# EAGLE board NARTF (EAGLE 7.7.0)
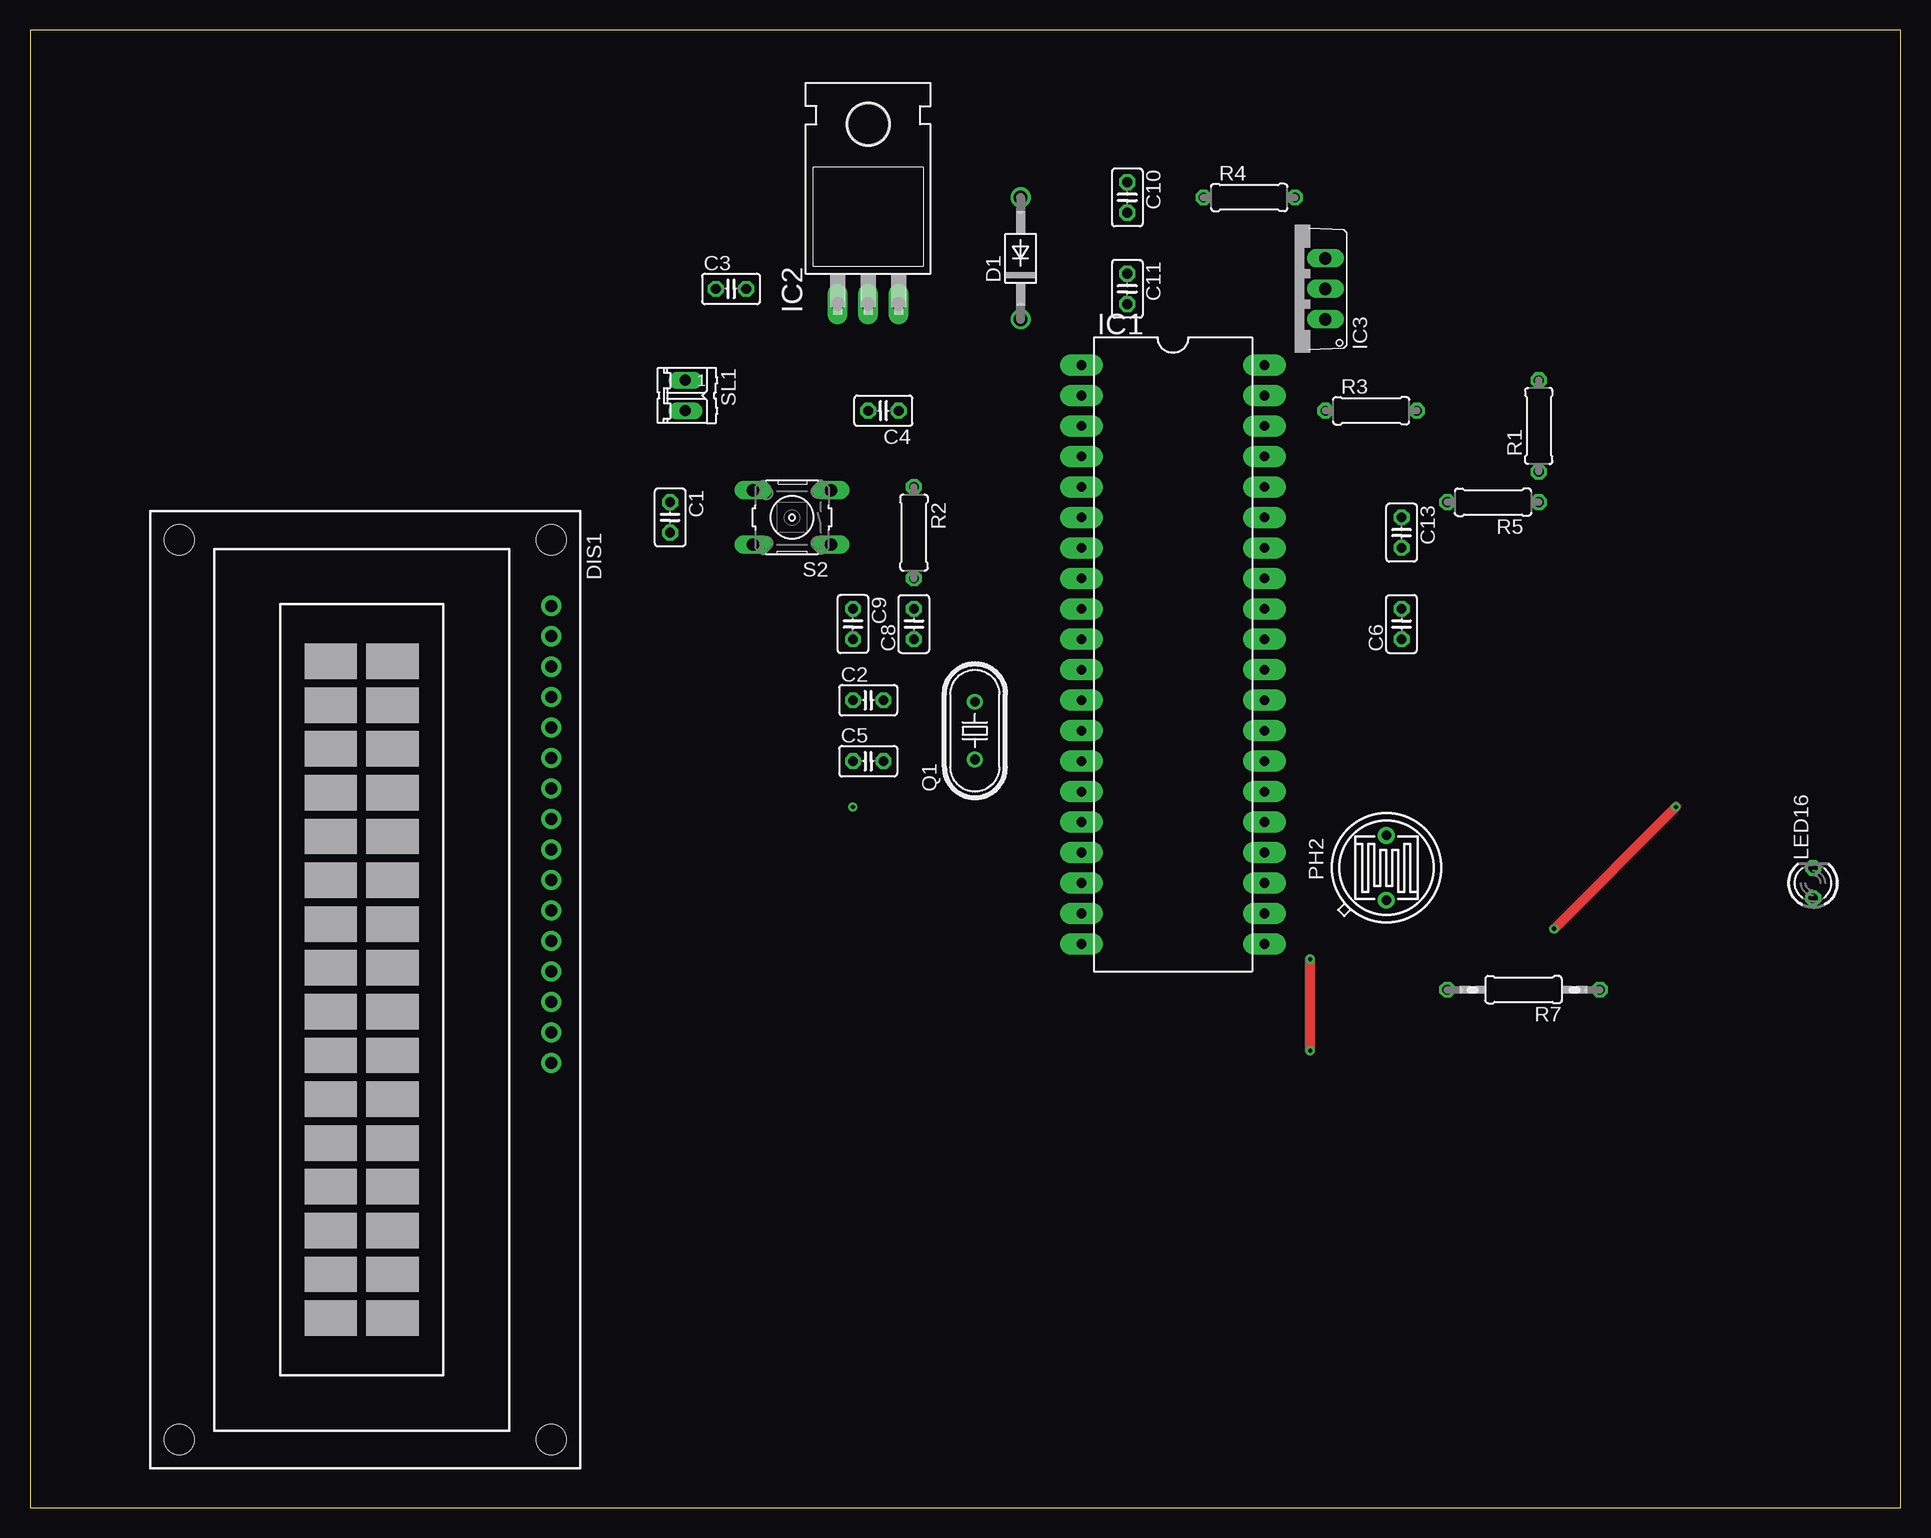
[diagram p0: board, top side]
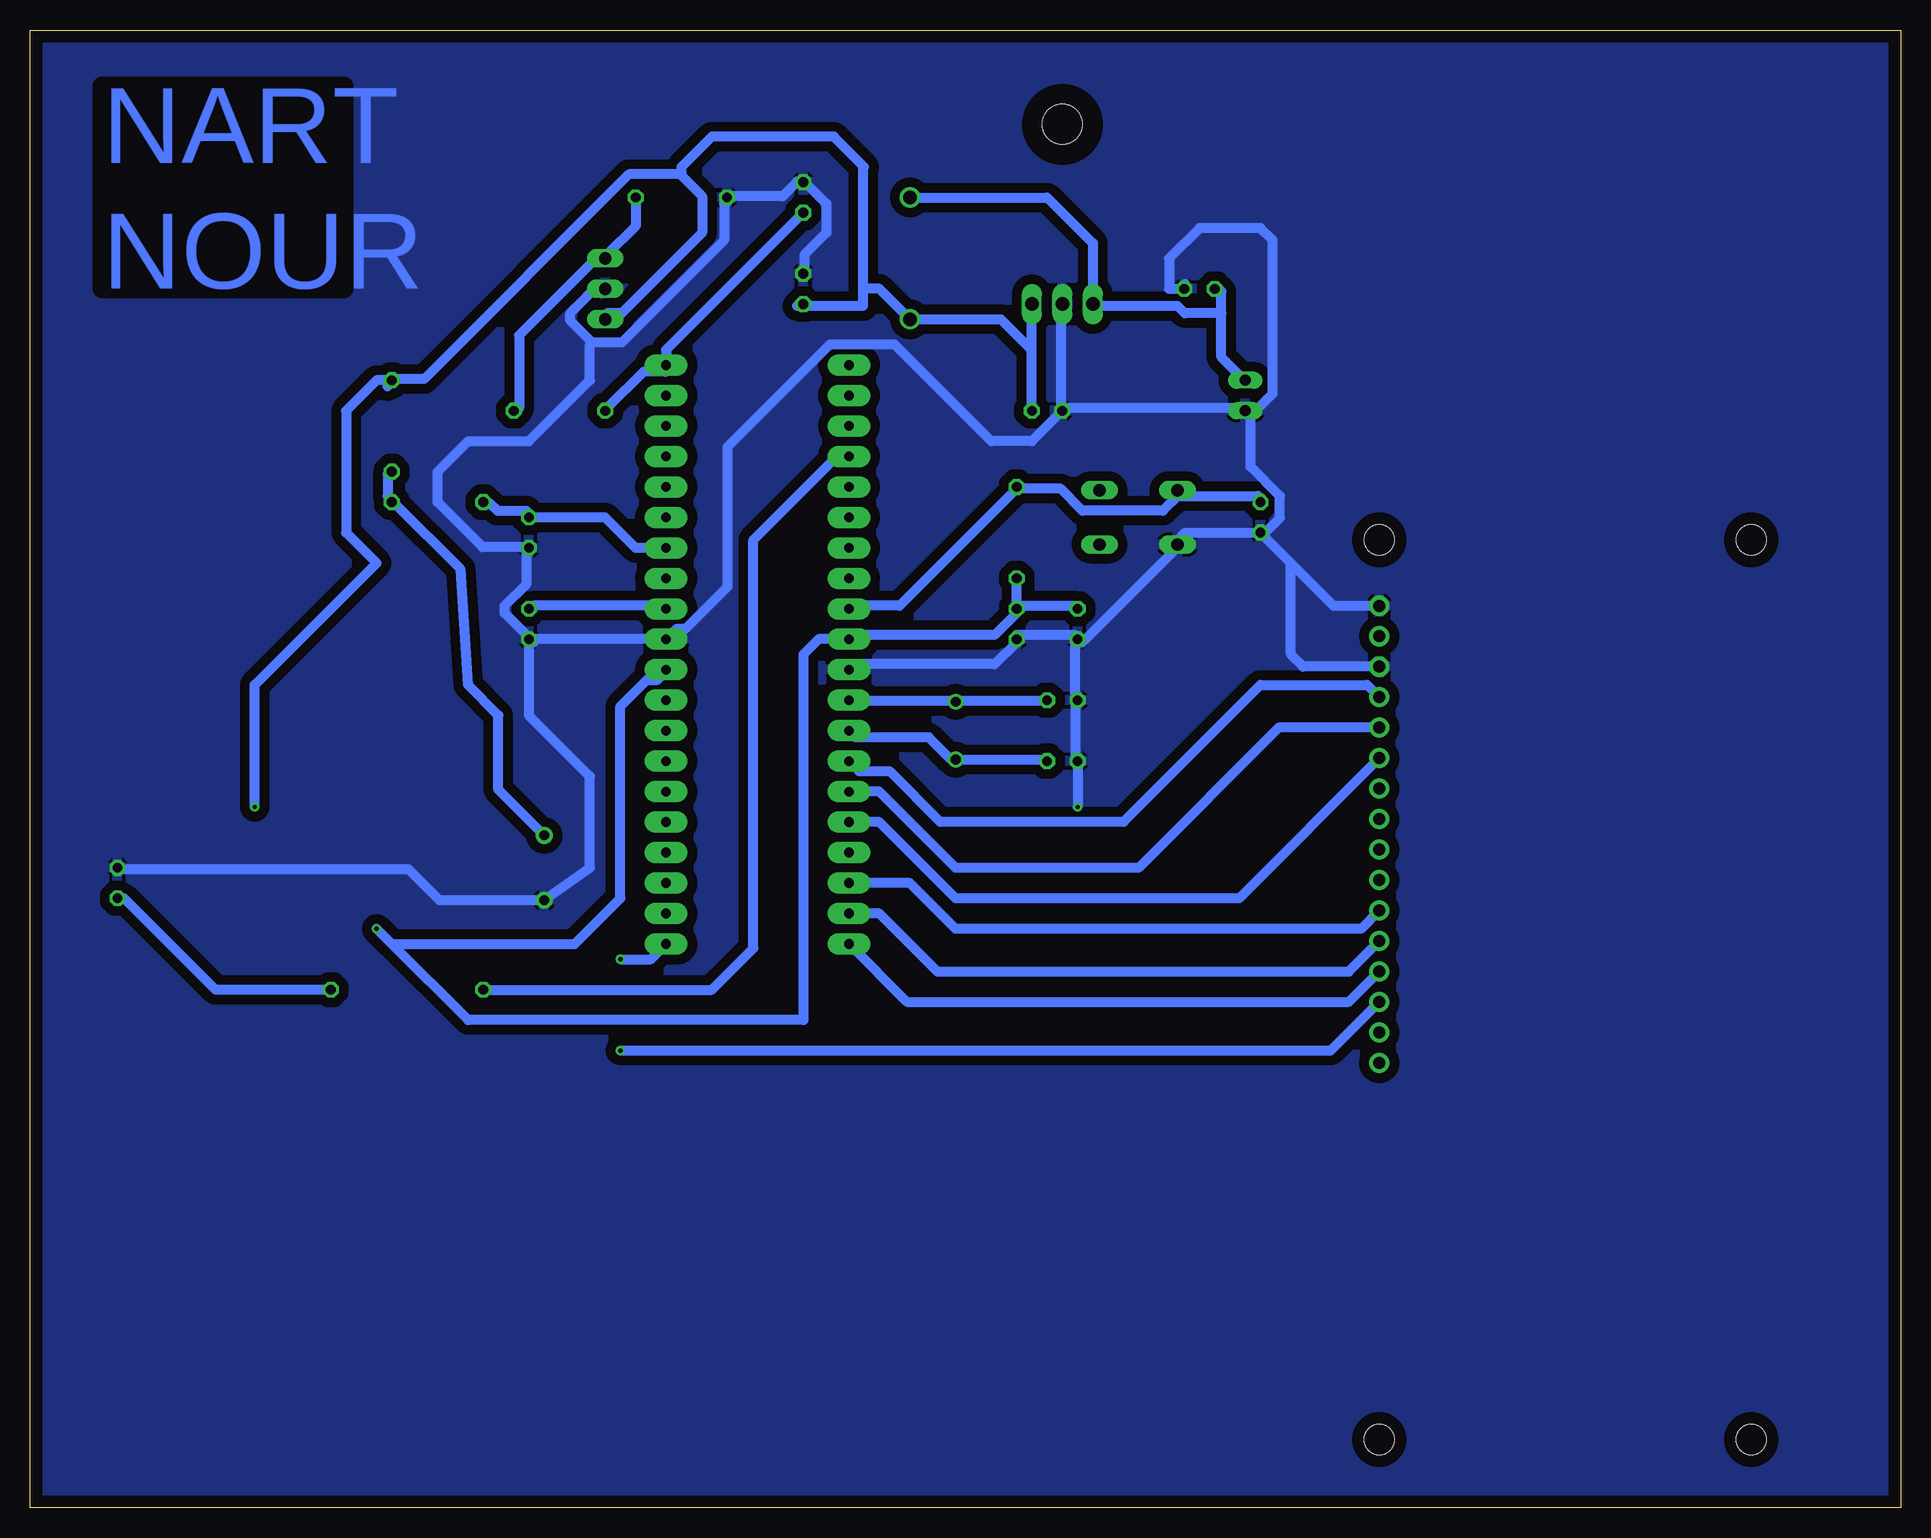
[diagram p1: board, bottom side, seen from below]

Size 155.88 x 123.18 mm. Coordinates in mm from the lower left corner, seen from the top.
Outline: 0,0 155.88,0 155.88,123.18 0,123.18 0,0
Copper layers (1*16): Top 0.035mm / dielectric 1.5mm / Bottom 0.035mm
Design rules "default *": minimum track width 32mil, minimum drill 0.35mm, track to track 16mil, track to pad 16mil, pad to pad 6mil, via to via 6mil, smd to smd 6mil, copper to edge 40mil, drill to drill 6mil, minimum pad ring 10mil, minimum via ring 8mil, stop-mask expansion 4mil, vias tented up to drill 0mil, thermal gap 10mil

## Footprints (pad centres in the part's own frame; a part is rotated, then mirrored left to right if it is on the bottom)
C025-025X050 = drill 0.813 octagon: 1 -1.27,0; 2 1.27,0
DO41-10 = drill 1.118: A 5.08,0; C -5.08,0
TUXGR_16X2_R2 = drill 1 pad 1.676: 1 -32,15.5; 2 -29.46,15.5; 3 -26.92,15.5; 4 -24.38,15.5; 5 -21.84,15.5; 6 -19.3,15.5; 7 -16.76,15.5; 8 -14.22,15.5; 9 -11.68,15.5; 10 -9.14,15.5; 11 -6.6,15.5; 12 -4.06,15.5; 13 -1.52,15.5; 14 1.02,15.5; 15 3.56,15.5; 16 6.1,15.5 | hole 2.5: -37.5,-15.5; 37.5,-15.5; -37.5,15.5; 37.5,15.5
DIL40 = drill 0.813 pad 1.778 long: 1 -24.13,-7.62; 2 -21.59,-7.62; 3 -19.05,-7.62; 4 -16.51,-7.62; 5 -13.97,-7.62; 6 -11.43,-7.62; 7 -8.89,-7.62; 8 -6.35,-7.62; 9 -3.81,-7.62; 10 -1.27,-7.62; 11 1.27,-7.62; 12 3.81,-7.62; 13 6.35,-7.62; 14 8.89,-7.62; 15 11.43,-7.62; 16 13.97,-7.62; 17 16.51,-7.62; 18 19.05,-7.62; 19 21.59,-7.62; 20 24.13,-7.62; 21 24.13,7.62; 22 21.59,7.62; 23 19.05,7.62; 24 16.51,7.62; 25 13.97,7.62; 26 11.43,7.62; 27 8.89,7.62; 28 6.35,7.62; 29 3.81,7.62; 30 1.27,7.62; 31 -1.27,7.62; 32 -3.81,7.62; 33 -6.35,7.62; 34 -8.89,7.62; 35 -11.43,7.62; 36 -13.97,7.62; 37 -16.51,7.62; 38 -19.05,7.62; 39 -21.59,7.62; 40 -24.13,7.62
TO220H = drill 1.118 long: 1 -2.54,-10.16; 2 0,-10.16; 3 2.54,-10.16 | hole 3.302: 0,4.826
TO220V = drill 1.016 long: 1 -2.54,-2.54; 2 0,-2.54; 3 2.54,-2.54
LED3MM = drill 0.813 octagon: A -1.27,0; K 1.27,0
TO-5_V10 = drill 0.8 pad 1.4: 1 -2.7,0; 2 2.7,0
HC49U70 = drill 0.813: 1 -2.413,0; 2 2.413,0
0207/7 = drill 0.813 octagon: 1 -3.81,0; 2 3.81,0
0207/12 = drill 0.813 octagon: 1 -6.35,0; 2 6.35,0
B3F-10XX = drill 1.016 long: 1 -3.251,2.261; 2 3.251,2.261; 3 -3.251,-2.261; 4 3.251,-2.261
02P = drill 0.914 long: 1 -1.27,0; 2 1.27,0

## Placement (x,y rotation side)
C1  1uF  [C025-025X050]  53.34,82.55 270 top
C2  22pF  [C025-025X050]  69.85,67.31 0 top
C3  100nF  [C025-025X050]  58.42,101.6 0 top
C4  100nF  [C025-025X050]  71.12,91.44 180 top
C5  22pF  [C025-025X050]  69.85,62.23 0 top
C6  100nF  [C025-025X050]  114.3,73.66 90 top
C8  100nF  [C025-025X050]  73.66,73.66 90 top
C9  1uF  [C025-025X050]  68.58,73.66 270 top
C10  1uF  [C025-025X050]  91.44,109.22 270 top
C11  100nF  [C025-025X050]  91.44,101.6 270 top
C13  100nF  [C025-025X050]  114.3,81.28 270 top
D1  1N4004  [DO41-10]  82.55,104.14 90 top
DIS1  TUXGR_16X2_R2  [TUXGR_16X2_R2]  27.94,43.18 270 top
IC1  MEGA16-P  [DIL40]  95.25,71.12 270 top
IC2  7805T  [TO220H]  69.85,110.49 0 top
IC3  LM35DT  [TO220V]  105.41,101.6 90 top
LED16  [LED3MM]  148.59,52.07 90 top
PH2  V1060_21  [TO-5_V10]  113.03,53.34 270 top
Q1  [HC49U70]  78.74,64.77 90 top
R1  5k6  [0207/7]  125.73,90.17 90 top
R2  10k  [0207/7]  73.66,81.28 270 top
R3  100  [0207/7]  111.76,91.44 0 top
R4  10K  [0207/7]  101.6,109.22 0 top
R5  330  [0207/7]  121.92,83.82 180 top
R7  [0207/12]  124.46,43.18 180 top
S2  [B3F-10XX]  63.5,82.55 180 top
SL1  [02P]  54.61,92.71 270 top

## Library data of the parts
C1-C6 C8-C11 C13 = rcl; SPICEPREFIX: C
D1 = diode
DIS1 = display-lcd; OC_FARNELL: unknown; OC_NEWARK: unknown
IC1 = atmel; MPN: ATMEGA16-16PU; OC_FARNELL: 9171142; OC_NEWARK: 01M6885
IC2 = linear
IC3 = lm35
LED16 = led
PH2 = photo-elements
Q1 = crystal; OC_FARNELL: unknown; OC_NEWARK: unknown
R1-R5 = rcl@1
R7 = rcl; SPICEPREFIX: R
S2 = switch-omron; MPN: B3F-1000; OC_FARNELL: 176432; OC_NEWARK: 36M3542
SL1 = con-amp-quick; OC_FARNELL: unknown; OC_NEWARK: unknown

## Nets
GND: C1.2 C2.1 C3.2 C4.2 C5.1 C6.1 C8.1 C9.2 C10.1 C11.1 C13.2 DIS1.1 DIS1.3 IC1.11 IC1.31 IC2.2 IC3.2 LED16.K PH2.2 R4.1 S2.2 SL1.2
N$1: C1.1 IC1.9 R2.1 S2.4
N$2: IC1.4 R7.2
N$3: C3.1 D1.A IC2.1 SL1.1
N$4: C2.2 IC1.12 Q1.2
N$5: C5.2 IC1.13 Q1.1
N$7: C6.2 IC1.32
N$8: C13.1 IC1.34 R5.2
N$9: LED16.A R7.1
N$10: IC3.3 R3.2 R4.2
N$11: DIS1.11 IC1.18
N$12: C10.2 IC1.40 R3.1
N$13: DIS1.12 IC1.19
N$14: DIS1.13 IC1.20
N$15: PH2.1 R1.1 R5.1
N$17: DIS1.4 IC1.14
N$18: DIS1.5 IC1.15
N$19: DIS1.6 IC1.16
N$20: DIS1.2
NART-NOUR: DIS1.14 IC1.21
VCC: C4.1 C8.2 C9.1 C11.2 D1.C IC1.10 IC1.30 IC2.3 IC3.1 R1.2 R2.2

## Tracks (layer width: path | path; a pad name or v marks a point on that pad's centre or on a via)
GND  (via drill 0.35)
  Bottom 0.813: C4.2 70,91.64 70,100.18 IC2.2 | 54.15,91.03 52.32,92.86 52.32,105.66 53.34,106.68 58.42,106.68 60.96,104.14 60.96,101.6 60.05,101.6 59.64,102.01 C3.2 | C4.2 69.39,91.64 54.76,91.64 SL1.2 54.15,91.03 | C1.2 59.64,81.28 60.25,80.67 S2.2 60.25,80.06 68.17,72.14 C9.2 | C9.2 68.78,72.14 68.78,67.87 C2.1 68.78,67.26 68.78,62.38 C5.1 v68.58,58.42 | C9.2 68.78,72.75 73.66,72.75 C8.1 73.66,72.14 75.49,70.31 87.07,70.31 IC1.11 87.68,69.7 88.9,69.7 | 54.15,91.03 54.15,86.77 51.71,84.33 51.71,82.5 52.93,81.28 C1.2 | C11.1 91.34,103.23 91.34,104.45 89.51,106.27 89.51,108.71 91.34,110.54 C10.1 91.95,110.54 93.17,109.32 97.43,109.32 R4.1 98.04,108.71 98.04,105.66 106.58,97.13 109.02,97.13 | 109.02,97.13 110.85,98.96 110.85,99.57 109.02,101.4 108.41,101.4 IC3.2 | 113.89,72.14 C6.1 | C6.1 114.5,72.75 116.33,74.57 116.33,75.18 114.5,77.01 114.5,79.45 C13.2 114.5,80.06 118.16,80.06 121.92,83.82 121.92,86.36 119.38,88.9 114.3,88.9 109.22,93.98 109.22,96.93 109.02,97.13 | 113.28,50.8 PH2.2 | LED16.K 148.03,53.24 124.36,53.24 121.76,50.64 PH2.2 | PH2.2 109.22,53.34 109.22,60.96 114.3,66.04 C6.1 | DIS1.1 47.24,75.18 50.8,78.74 | 50.8,78.74 C1.2 | DIS1.3 49.78,70.1 50.8,71.12 50.8,78.74 | C6.1 IC1.31 102.03,73.23 101.28,73.23 97.74,76.77 97.74,88.44 89.22,96.95 83.82,96.95 75.77,88.9 72.39,88.9 C4.2
  pour Bottom (isolate 0.813): -17.54,127 157.48,127 172.72,111.76 172.72,-5.08 -5.03,-5.08
N$1
  Bottom 0.813: 60.25,84.33 53.54,84.33 C1.1 | 73.66,84.94 70,84.94 68.17,83.11 61.47,83.11 60.25,84.33 | 60.25,84.33 S2.4 | 73.66,84.94 83.41,75.18 87.07,75.18 IC1.9 | 73.66,84.94 R2.1
N$2
  Bottom 0.813: IC1.4 87.68,87.38 88.9,87.38 95.61,80.67 95.61,46.63 99.06,43.18 R7.2
N$3
  Bottom 0.813: 56.59,99.57 56.59,95.91 54.76,94.08 SL1.1 | 56.59,99.57 56.59,101.4 C3.1 | 56.59,99.57 59.64,99.57 60.25,100.18 66.95,100.18 IC2.1 | 66.95,100.79 IC2.1 | IC2.1 67.31,105.41 71.12,109.22 D1.A
N$4
  Bottom 0.813: C2.2 71.22,67.26 78.54,67.26 Q1.2 79.15,67.26 87.07,67.26 IC1.12
N$5
  Bottom 0.813: C5.2 71.22,62.38 78.54,62.38 Q1.1 79.15,62.38 80.97,64.21 87.07,64.21 IC1.13
N$7
  Bottom 0.813: C6.2 113.89,75.18 102.92,75.18 IC1.32
N$8
  Bottom 0.813: C13.1 114.5,83.11 116.94,83.11 117.55,83.72 R5.2 | 102.92,80.06 IC1.34 105.41,80.01 107.95,82.55 C13.1 | 113.89,82.5 C13.1
N$9
  Bottom 0.813: LED16.A 148.03,50.8 140.41,43.18 R7.1
N$10
  Bottom 0.813: R4.2 105.36,108.71 105.36,106.88 107.8,104.45 IC3.3 108.41,104.45 115.11,97.74 115.11,91.64 R3.2
N$11
  Bottom 0.813: DIS1.11 44.96,48.26 78.74,48.26 82.55,52.07 IC1.18
N$12
  Bottom 0.813: 102.31,95.3 IC1.40 | R3.1 107.8,91.64 104.75,94.69 102.92,94.69 IC1.40 | C10.2 102.87,96.52 IC1.40
N$13
  Bottom 0.813: DIS1.12 45.98,44.7 80.26,44.7 85.09,49.53 IC1.19
N$14
  Bottom 0.813: DIS1.13 45.98,42.16 82.8,42.16 IC1.20
N$15
  Bottom 0.813: R1.1 126.09,86.16 126.09,84.33 R5.1 125.48,83.72 119.99,78.23 119.38,68.58 116.84,66.04 116.84,59.85 PH2.1 113.28,56.29
N$17
  Bottom 0.813: IC1.14 86.79,61.39 84.25,61.39 80.06,57.2 64.72,57.2 53.34,68.58 44.46,68.58 DIS1.4
N$18
  Bottom 0.813: DIS1.5 51.82,65.02 63.5,53.34 78.74,53.34 85.09,59.69 IC1.15
N$19
  Bottom 0.813: DIS1.6 55.12,50.8 78.74,50.8 85.09,57.15 IC1.16
NART-NOUR  (via drill 0.35)
  Top 0.813: v106.68,38.1 v106.68,45.72
  Bottom 0.813: v106.68,38.1 47.5,38.1 DIS1.14 | v106.68,45.72 104.14,45.72 IC1.21
VCC  (via drill 0.35)
  Top 0.813: v127,48.26 v137.16,58.42
  Bottom 0.813: 73.66,75.18 68.78,75.18 C9.1 | 73.66,75.18 R2.2 | 73.66,75.18 C8.2 73.66,74.57 75.49,72.75 87.07,72.75 IC1.10 | 126.09,93.47 R1.2 | 72.44,96.52 72.44,100.18 IC2.3 | 72.44,96.52 72.44,91.64 C4.1 | IC3.1 107.8,99.57 106.58,99.57 99.87,106.27 99.87,109.32 101.7,111.15 | 101.7,111.15 105.97,111.15 123.04,94.08 125.48,94.08 R1.2 | 88.9,72.14 87.68,72.14 IC1.10 | 91.95,100.18 C11.2 91.34,100.18 86.46,100.18 86.46,101.6 | 101.7,111.15 101.6,111.25 101.6,111.76 99.06,114.3 88.9,114.3 86.36,111.76 86.46,111.66 86.46,101.6 | R1.2 127,93.98 129.54,91.44 129.54,81.28 127,78.74 137.16,68.58 v137.16,58.42 | IC1.10 90.17,72.39 91.44,71.12 91.44,40.64 119.38,40.64 125.73,46.99 | 125.73,46.99 v127,48.26 | 125.73,46.99 110.49,46.99 106.68,50.8 106.68,66.8 104.9,68.58 104.46,69.01 104.14,69.01 103.61,69.01 102.92,69.7 IC1.30 | 72.44,96.52 74.98,99.06 D1.C 85.09,101.6 86.46,101.6

## Text on the board
Bottom: NART / NOUR